# Altium PCB nRF52_UWB_MPU9255_Second.pcbdoc
Units mm, origin at the board's own origin, x right, y up, seen from the top; angles counter-clockwise.
Board outline 93.99 x 58.53 mm, 2 copper layers (Top Layer, Bottom Layer); 31 components, 47 nets, 182 pads, 50 vias.
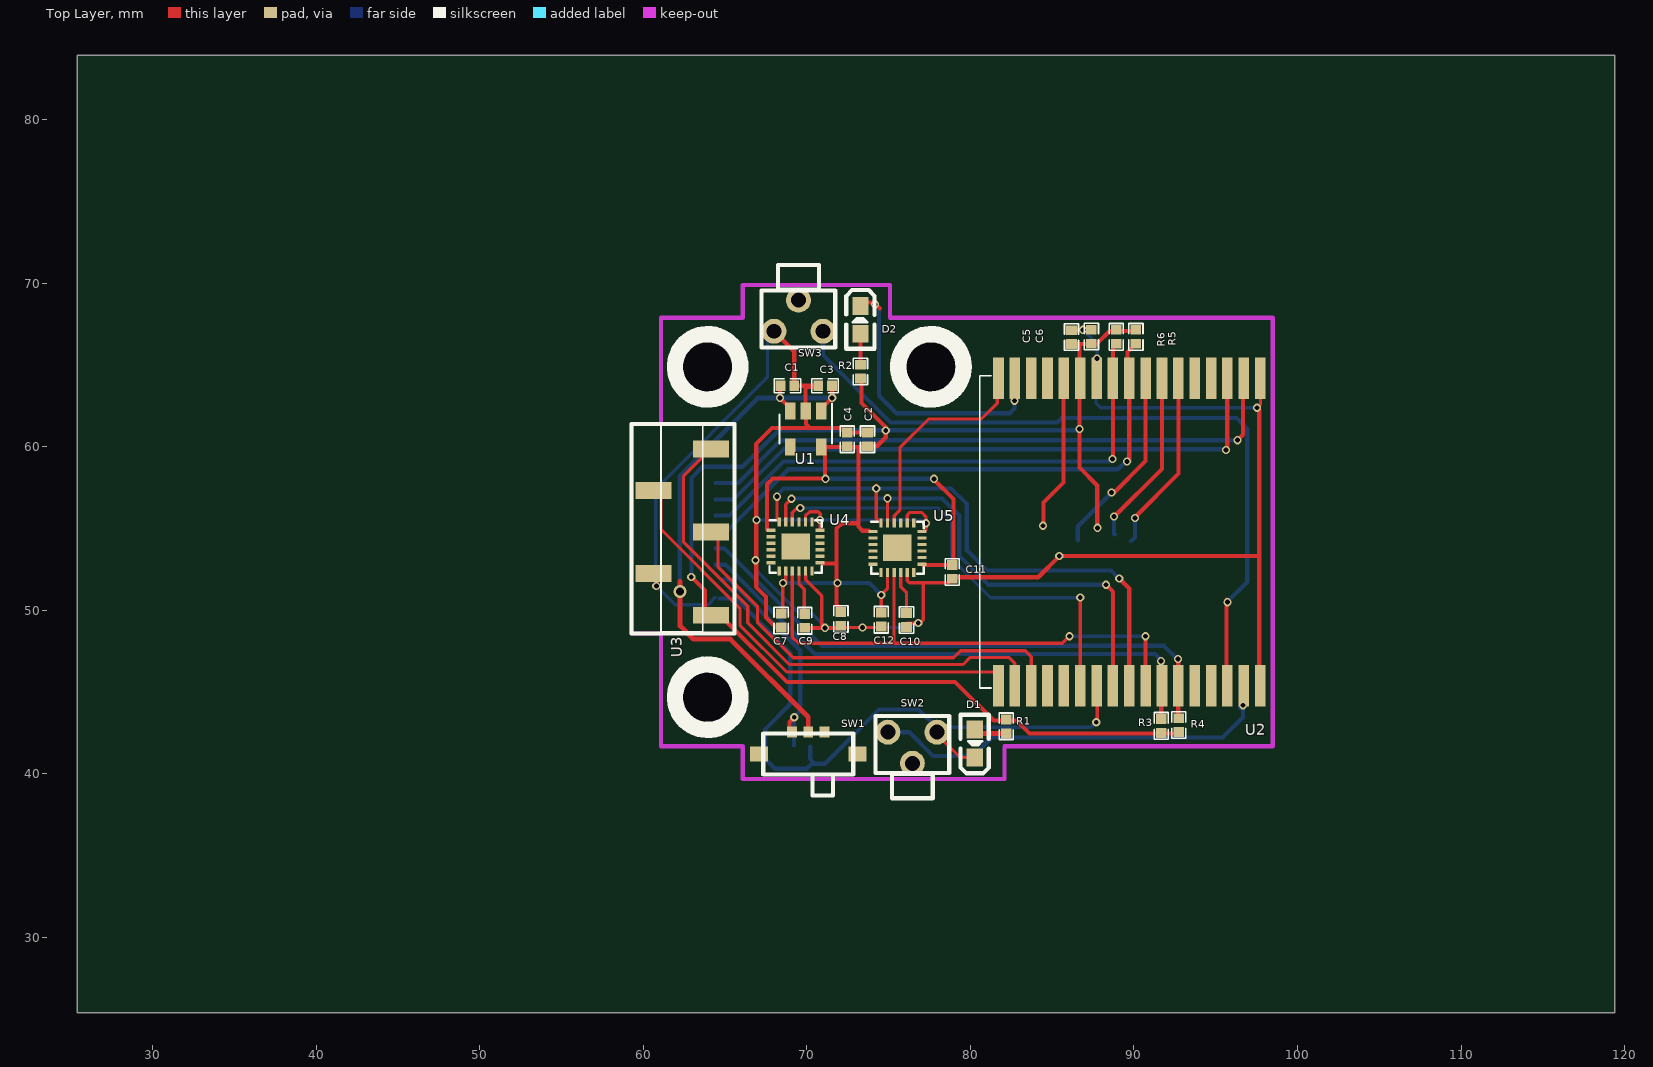
[diagram p0: Top Layer view]
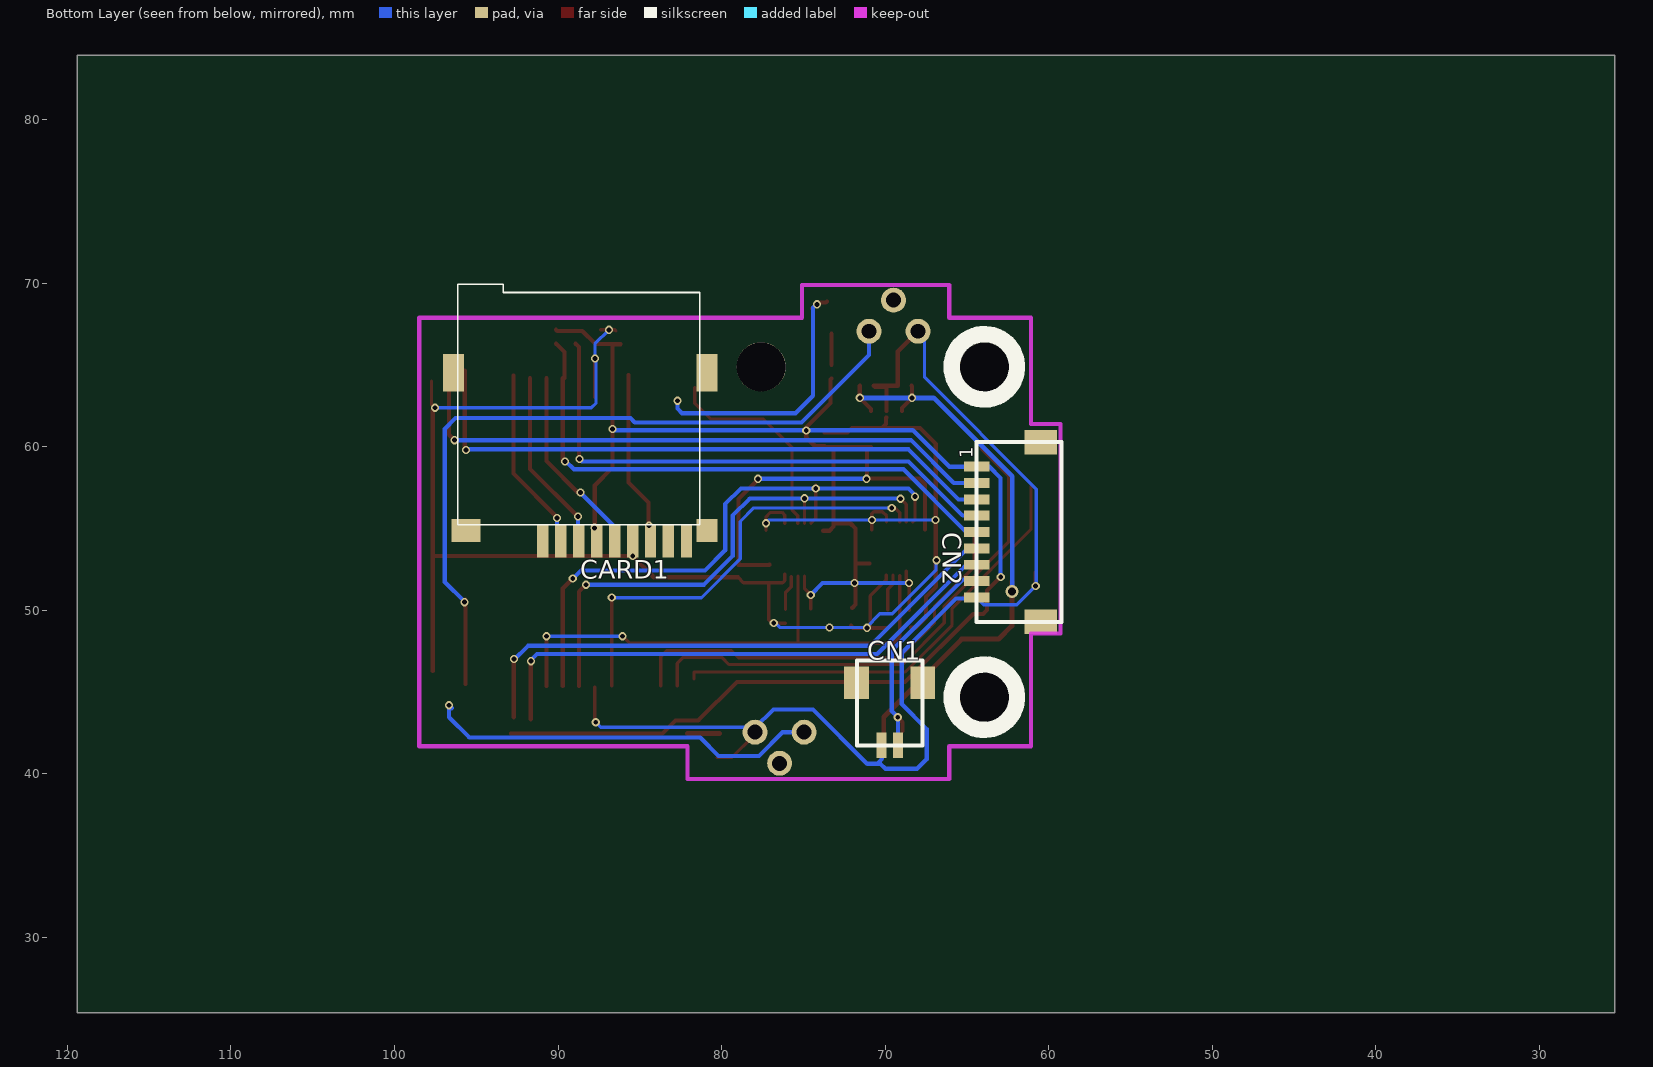
[diagram p1: Bottom Layer view, seen from below]

## Layer stack, top to bottom
Top Layer: signal copper 0.0356
Dielectric: dielectric 0.32, FR-4, Dk 4.8
Bottom Layer: signal copper 0.0356

## Board outline
119.391,25.4 25.4,25.4 25.4,83.929 119.391,83.929

## Design rules (kind name [scope] priority, off if disabled: settings)
Clearance [All] p1: gap=0.2
ComponentClearance [All] p1 off: gap=0.254 collisioncheckmode=3 verticalgap=0.254
PolygonConnect [All] p1: connectstyle=Relief reliefconductorwidth=0.254 reliefentries=4 polygonreliefangle="90 Angle"
RoutingVias [All] p1: holewidth=0.711 width=1.27 viastyle="Through Hole" minholewidth=0.3 minwidth=0.3 maxholewidth=0.711 maxwidth=1.27
SolderMaskExpansion [All] p1: expansion=0.102
TestPointUsage [All] p1: valid=0 allowmultiple=FALSE
Testpoint [All] p1: side=15 testpointundercomponent=TRUE minsize=1.016 maxsize=2.54 preferedsize=1.524 minholesize=0 maxholesize=1.016 preferedholesize=0.813 testpointgrid=0.025 style=1023 order=0123456789
Width [All] p1: maxlimit=1 minlimit=0.2 preferedwidth=0.254 minimp=50.000000 maximp=50.000000 favimp=50.000000
18 further rules are at their usual default settings.

## Components (designator, comment, footprint, x,y, rotation, side; value= is the part's Value field where it differs from the comment)
C1 "10uF" 0402 68.809,63.729 r180 top
C2 "10uF" 0402 73.711,60.452 r270 top
C3 "100nF" 0402 71.12,63.729 r0 top
C4 "100nF" 0402 72.466,60.452 r270 top
C5 "10uF" 0402 86.182,66.7 r270 top
C6 "100nF" 0402 87.401,66.726 r270 top
C7 "10nF" 0402 68.428,49.378 r90 top
C8 "100nF" 0402 72.085,49.479 r90 top
C9 "100nF" 0402 69.875,49.352 r270 top
C10 "100nF" 0402 76.098,49.403 r270 top
C11 "100nF" 0402 78.892,52.349 r90 top
C12 "10nF" 0402 74.549,49.428 r90 top
CARD1 "HYC77-TF09-200" TF-015 88.646,59.376 r180 bottom locked
CN1 "A1002WV-S-2P" A1002WR-S-2P_LEO 69.721,43.666 r180 bottom
CN2 "A1002WR-S-9P" A1002WR-S-9P_LEO 62.486,54.786 r270 bottom
D1 "YELLOW" LED-0603 80.264,41.85 r90 top
D2 "RED" LED-0603 73.279,67.758 r270 top
R1 "1K" 0402 82.194,42.901 r270 top
R2 "200" 0402 73.279,64.592 r270 top
R3 "10K" 0402 91.669,42.926 r270 top
R4 "10K" 0402 92.735,42.977 r270 top
R5 "10K" 0402 90.119,66.726 r90 top
R6 "10K" 0402 88.925,66.726 r90 top
SW1 "SSAJ120100" SW-SMD-5.5X2.5 70.087,41.885 r0 top
SW2 "KAN4562-0501C" KAN4562-0501C 76.454,41.596 r0 top
SW3 "KAN4562-0501C" KAN4562-0501C 69.487,68.012 r180 top
U1 "SPX3819M5-L-3-3/TR" SOT-23-5 69.926,61.087 r270 top
U2 "DWM1001" DWM1001 93.587,54.785 r270 top locked
U3 "GPS_Header" GPS_HEADER_SMT 61.087,41.685 r90 top locked
U4 "MPU-9250" QFN-24-1EP_3X3MM_PITCH0.4MM 69.317,53.899 r0 top
U5 "MPU-9250" QFN-24-1EP_3X3MM_PITCH0.4MM 75.54,53.823 r0 top

## Footprints (in the part's own frame and the unit in brackets; to place one, negate y for a bottom-side part, rotate by r counter-clockwise, add the part's x,y. Pads: shape width x height; smd on the part's side, far side on the other; paste and mask are expansions set on the pad)
0402 [mm]
  rect 0.6x0.65 smd: 1(-0.424,0) 2(0.424,0)
  silkscreen extent -0.82,-0.43 0.81,0.43
A1002WR-S-2P_LEO [mm]
  rect 0.6x1.55 smd: 1(-0.502,-1.925) 2(0.498,-1.925)
  rect 1.5x2 smd: 3(-2.033,1.904) 4(2.031,1.904)
  silkscreen extent -2,-1.92 2,3.27
A1002WR-S-9P_LEO [mm]
  rect 0.6x1.55 smd: 1(-4.001,-1.923) 2(-3,-1.923) 3(-1.997,-1.926) 4(-1.001,-1.923) 5(0,-1.923) 6(1,-1.923) 7(1.999,-1.923) 8(3.001,-1.923) 9(4,-1.923)
  rect 1.5x2 smd: 10(-5.499,2) 11(5.5,2)
  silkscreen extent -5.5,-1.92 5.5,3.28
DWM1001 [mm]
  rect 2.54x0.65 smd: 1(-9.404,4.129) 2(-9.404,3.129) 3(-9.404,2.128) 4(-9.404,1.13) 5(-9.404,0.129) 6(-9.404,-0.872) 7(-9.404,-1.87) 8(-9.404,-2.871) 9(-9.404,-3.872) 10(-9.404,-4.871) 11(-9.404,-5.871) 12(-9.404,-6.871) 13(-9.404,-7.872) 14(-9.404,-8.87) 15(-9.404,-9.871) 16(-9.404,-10.872) 17(-9.404,-11.87) 18(9.404,-11.87) 19(9.404,-10.872) 20(9.404,-9.871) 21(9.404,-8.87) 22(9.404,-7.872) 23(9.404,-6.871) 24(9.404,-5.871) 25(9.404,-4.871) 26(9.404,-3.872) 27(9.404,-2.871) 28(9.404,-1.87) 29(9.404,-0.872) 30(9.404,0.129) 31(9.404,1.13) 32(9.404,2.128) 33(9.404,3.129) 34(9.404,4.129)
  silkscreen extent -9.56,-13.02 9.54,-12.32
GPS_HEADER_SMT [mm]
  rect 1.02x2.2 smd: 1(8.02,-3.051) 2(10.56,0.45) 3(13.1,-3.051) 4(15.64,0.45) 5(18.18,-3.051)
  round 3 hole 3 unplated: ""(3,-2.85) ""(23.2,-2.85)
  silkscreen extent 1,-4.85 25.2,1.8
KAN4562-0501C [mil]
  round 60 hole 36: 0(0,-37.4) 1(-59.05,37.4) 2(59.06,37.4)
  silkscreen extent -89,-122 89,77
LED-0603 [mil]
  rect 43x39 smd: 1(33.5,0) 2(-33.5,0)
  silkscreen extent -72,-34 70,34
QFN-24-1EP_3X3MM_PITCH0.4MM [mm]
  rect 0.55x0.2 smd: 1(-1.5,0.999) 2(-1.5,0.601) 3(-1.5,0.199) 4(-1.5,-0.199) 5(-1.5,-0.601) 6(-1.5,-0.999) 13(1.5,-0.999) 14(1.5,-0.601) 15(1.5,-0.199) 16(1.5,0.199) 17(1.5,0.601) 18(1.5,0.999)
  rect 0.2x0.55 smd: 7(-0.999,-1.5) 8(-0.601,-1.5) 9(-0.199,-1.5) 10(0.199,-1.5) 11(0.601,-1.5) 12(0.999,-1.5) 19(0.999,1.5) 20(0.601,1.5) 21(0.199,1.5) 22(-0.199,1.5) 23(-0.601,1.5) 24(-0.999,1.5)
  rect 0.875x0.8 smd: 25(-0.434,-0.4) 25(-0.434,0.4) 25(0.436,-0.4) 25(0.436,0.4)
  silkscreen extent -1.6,-1.6 1.6,1.6
SOT-23-5 [mm]
  rect 1.06x0.65 smd: 1(-1.1,0.95) 2(-1.1,0) 3(-1.1,-0.95) 4(1.1,-0.95) 5(1.1,0.95)
  silkscreen extent -1.55,-1.61 0.9,1.61
SW-SMD-5.5X2.5 [mm]
  rect 0.6x0.7 smd: 1(-0.999,0.675) 2(1,0.675) C(-0.001,0.675)
  rect 1.1x0.9 smd: 4(-2.999,-0.675) 5(3,-0.675)
  silkscreen extent -2.75,-3.22 2.75,0.57
TF-015 [mil]
  rect 27.56x78.74 smd: 1(-90.2,-202.55) 2(-46.95,-202.5) 3(-3.75,-202.55) 4(39.5,-202.55) 5(82.8,-202.55) 6(126,-202.55) 7(169.2,-202.55) 8(212.4,-202.55) 9(255.9,-202.55)
  rect 50x55 smd: 10(305,-177.4)
  rect 50x90 smd: 11(305,202.6) 12(-305,202.6)
  rect 70x55 smd: 13(-275,-177.4)
  silkscreen extent -295,-163 288,416

## Free pads (board coordinates)
  round 3 hole 3 unplated: ""(77.587,64.885)

## Via types
v1: diameter 0.5, hole 0.3, Top Layer to Bottom Layer, tented both sides, 49 vias
v2: diameter 0.8, hole 0.5, Top Layer to Bottom Layer, tented both sides, 1 vias

## Nets (pads, with @x,y where several pads share a name; then routed paths per layer and width w, separated by ;. In a path a pad name is that pad's centre, name@x,y a point inside that pad or via, vN(x,y) a via of type N, cw(c..) or ccw(c..) an arc to the next point about the centre after c; other vN are vias at no path point)
BUTTON_RST: SW2.1 U2.33 | length 24.2
  Bottom Layer w0.254: SW2.1 76.275,42.546 77.724,41.097 80.188,41.097 81.305,42.215 95.428,42.215 96.672,43.459 v1@96.672,44.171
  Bottom Layer w0.3: v1@96.52,44.018 v1@96.672,44.171
  other v1: 96.664,44.196
BUTTON_SDCARD: SW3.1 U2.32 | length 45.7
  Top Layer w0.254: U2.32@95.656,45.491 v1@95.656,50.648
  Bottom Layer w0.254: SW3.1 70.987,65.614 75.115,61.486 85.311,61.486 85.573,61.747 96.266,61.747 96.926,61.087 96.926,51.74 v1@95.733,50.546
  other v1: 95.724,50.495
CHARGE_VC: CN1.2 CN2.8 SW1.1 | length 13.5
  Top Layer w0.254: SW1.1@68.936,42.621 68.936,43.155 v1@69.24,43.459
  Bottom Layer w0.254: CN2.8@64.846,51.892 65.253,51.892 69.596,47.549 69.596,43.833 69.223,43.459 CN1.2
  other v1: 69.232,43.459
D2_1: D2.1 R2.1 | length 1.9
  Top Layer w0.254: R2.1 D2.1
FOOT_2: CN2.4 R6.1 U2.10 | length 32.9
  Top Layer w0.254: v1@88.716,59.258 88.716,66.092 R6.1
  Bottom Layer w0.254: CN2.4 65.261,55.787 68.58,59.106 88.544,59.106 v1(88.697,59.258)
FOOT_5: CN2.5 R5.1 U2.9 | length 34.3
  Top Layer w0.254: U2.9@89.611,64.211 89.611,65.794 R5.1 ; v1@89.715,59.106 U2.9
  Bottom Layer w0.254: CN2.5 65.048,54.786 68.885,58.623 89.027,58.623 v1@89.51,59.106
  other v1: 89.586,59.106
FOOT_6: CN2.6 R4.1 U2.29 | length 34.7
  Top Layer w0.3: v1@92.685,47.041 92.71,47.015 R4.1@92.71,43.485
  Bottom Layer w0.254: CN2.6 64.959,53.786 70.917,47.828 91.846,47.828 v1@92.71,46.965
  other v1: 92.701,47.015
FOOT_7: CN2.7 R3.1 U2.28 | length 33.3
  Top Layer w0.3: R3.1 v1@91.669,46.888
  Bottom Layer w0.254: CN2.7 65.018,52.787 70.485,47.32 91.288,47.32 v1@91.719,46.888
  other v1: 91.66,46.888
GND: C1.1 C2.1 C3.1 C4.1 C5.1 C6.1 C7.1 C8.1 C9.2 C10.2 C11.1 C12.1 CARD1.6 CN1.1 CN2.9 D1.2 SW2.2 SW3.2 U1.2 U2.1 U2.11 U2.24 U2.34 U3.2 U4.11 U4.18 U4.20 U5.11 U5.18 U5.20 | length 191.6
  Top Layer w0.2: v1@60.808,51.486 60.833,51.511 U3.2@60.833,52.324 ; U4.20 69.917,55.77 70.18,56.032 70.688,56.032 70.815,55.905 U4.18@70.815,54.915 ; U4.11@69.926,52.146 69.926,51.867 70.917,50.876 v1@70.917,48.928 ; C8.1@72.187,48.946 C12.1@74.803,48.946 ; C10.2@76.098,49.207 76.893,49.207 77.114,49.428 77.114,51.689 ; U5.20 76.14,55.82 76.302,55.982 77.013,55.982 77.292,55.702 U5.18@77.292,54.889 ; U5.11@76.147,52.204 76.147,51.819 76.276,51.689 78.664,51.689 C11.1@78.994,52.019 ; SW2.2@78.08,42.291 79.371,40.999 D1.2 ; C5.1@86.462,67.081 86.53,67.15 C6.1 ; v1@87.681,43.104 87.757,43.18 U2.24@87.757,45.288 ; U2.11@87.706,65.456 87.757,65.405 U2.11@87.757,63.017 ; v1@97.536,62.357 97.739,62.56 U2.1@97.739,64.008
  Top Layer w0.254: SW3.2 69.233,65.816 C1.1 C3.1 70.62,63.652 69.901,63.652 69.926,63.627 U1.2 ; C7.1 68.115,48.953 67.513,49.555 67.513,50.825 66.904,51.435 66.904,60.173 67.869,61.138 72.034,61.138 72.296,60.876 C2.1 ; C9.2 71.958,48.928 C8.1 ; U1.2@69.926,61.798 69.952,61.773 69.952,61.392 70.206,61.138 ; C11.1@78.994,52.019 84.15,52.019 85.446,53.315 97.663,53.315 ; v1(97.527,62.382) 97.663,62.247 U2.34@97.663,46.279
  Bottom Layer w0.2: CN2.9 63.966,50.343 61.951,50.343 60.757,51.537 60.757,57.404 67.589,64.237 67.589,66.665 SW3.2 ; v1@66.878,53.061 66.898,53.041 66.898,52.451 69.565,49.784 70.333,49.784 71.171,48.946 76.429,48.946 v1@76.733,49.251 ; v1@66.929,55.524 77.08,55.524 v1(77.283,55.321) ; SW2.2 78.258,42.85 87.401,42.85 v1@87.706,43.155 ; v1(86.885,67.15) 87.748,66.286 v1(87.748,65.405) 87.681,65.338 87.681,62.662 87.96,62.382 v1(97.527,62.382)
  Bottom Layer w0.254: CN2.9@64.668,50.724 65.659,50.724 68.986,47.396 68.986,44.272 67.462,42.748 67.462,40.894 68.047,40.31 69.977,40.31 70.282,40.615 71.095,40.615 74.422,43.942 76.835,43.942 SW2.2@77.978,42.799 ; CN1.1@70.206,41.656 70.206,40.919 70.51,40.615 ; SW2.2@77.749,42.062 SW2.2@77.927,42.24
  other v1: 87.697,43.155 71.12,48.928 73.406,48.946 76.812,49.228 60.799,51.486 66.869,53.061 85.437,53.315 66.92,55.524 70.806,55.524
GPS_1PPS: U2.19 U3.5 | length 32
  Top Layer w0.2: U3.5 62.459,58.186 62.459,54.178 66.396,50.241 66.396,49.225 68.936,46.685 79.553,46.685 79.985,47.117 82.347,47.117 82.715,46.749 U2.19
GPS_UART_RX: U2.18 U3.4 | length 27.9
  Top Layer w0.2: U3.4@61.087,57.582 61.087,54.94 65.913,50.114 65.913,49.098 68.783,46.228 81.686,46.228 U2.18@81.686,45.796
GPS_UART_TX: U2.20 U3.3 | length 26.5
  Top Layer w0.2: U3.3@64.567,54.991 64.567,52.654 66.98,50.241 66.98,49.276 69.164,47.092 78.969,47.092 79.4,47.523 83.363,47.523 83.716,47.17 U2.20
LED_R: D2.2 U2.16 | length 16.2
  Top Layer w0.254: D2.2@73.558,68.885 73.635,68.809 74.117,68.809 74.473,68.453
  Bottom Layer w0.254: v1@74.168,68.758 74.422,68.504 74.422,63.119 75.492,62.049 82.42,62.049 82.702,62.332 v1(82.702,62.814)
  other v1: 74.168,68.707
MPU92_CLK: U2.25 U4.23 U5.23 | length 32.2
  Top Layer w0.2: U4.23 68.716,56.473 v1(69.063,56.82) ; U5.23 v1@74.939,56.845
  Top Layer w0.254: v1(88.29,51.562) 88.716,51.137 U2.25
  Bottom Layer w0.254: v1@69.113,56.845 78.276,56.845 79.324,55.797 79.324,53.328 81.071,51.582 ; 81.071,51.562 v1(88.29,51.562)
  other v1: 74.93,56.845
MPU92_MISO: U2.27 U4.9 U5.9 | length 32.8
  Top Layer w0.2: 69.113,52.121 69.113,48.362 69.494,47.981 85.623,47.981 v1(86.055,48.412) ; 75.336,47.981 U5.9@75.336,52.095
  Top Layer w0.254: U2.27 v1(90.716,48.412)
  Bottom Layer w0.2: v1(86.055,48.412) v1(90.716,48.412)
MPU92_MOSI: U2.26 U4.24 U5.24 | length 36
  Top Layer w0.2: v1(68.174,56.947) 68.174,55.542 U4.24 ; v1@74.244,57.658 74.244,55.617 U5.24
  Top Layer w0.254: v1(89.103,51.943) 89.715,51.331 U2.26
  Bottom Layer w0.254: v1@68.123,56.998 68.58,57.455 78.816,57.455 79.781,56.49 79.781,53.67 81.026,52.426 88.595,52.426 89.078,51.943 v1(89.103,51.943)
  other v1: 74.244,57.455
MPU92_NCS: U2.23 U4.22 | length 27.4
  Top Layer w0.2: U4.22 69.117,55.974 69.405,56.261 v1(69.596,56.261) ; U2.23 v1(86.716,50.775)
  Bottom Layer w0.2: v1@69.545,56.261 78.034,56.261 78.867,55.428 78.867,53.139 81.231,50.775 v1(86.716,50.775)
MPU92B_NCS: U2.17 U5.22 | length 12.8
  Top Layer w0.2: U5.22 75.34,55.777 75.692,56.128 75.692,59.944 77.445,61.697 80.67,61.697 81.636,62.662 U2.17@81.636,63.602
R1_2: D1.1 R1.2 | length 2
  Top Layer w0.3: D1.1@80.137,42.469 R1.2@82.093,42.469
S$33: 
S$35: 
S$39: 
S$41: 
S$52: 
S$54: 
S$1130: 
S$1132: 
S$1135: 
S$1137: 
S$1140: 
S$1142: 
S$1144: 
S$1146: 
S$1148: 
S$1150: 
S$1152: 
S$1154: 
SDCARD_CLK: CARD1.5 U2.8 | length 11.7
  Top Layer w0.254: v1@88.722,57.125 90.716,59.118 U2.8
  Bottom Layer w0.254: CARD1.5@86.563,54.28 86.563,55.118 v1@88.646,57.201
  other v1: 88.637,57.201
SDCARD_MISO: CARD1.7 U2.13 | length 9.7
  Top Layer w0.254: v1@84.404,55.194 84.48,55.27 84.48,56.591 85.7,57.81 U2.13@85.7,64.389
  other v1: 84.446,55.169
SDCARD_MOSI: CARD1.3 U2.7 | length 10.8
  Top Layer w0.254: v1@88.798,55.728 91.717,58.646 U2.7
  Bottom Layer w0.254: v1(88.79,55.728) 88.79,54.67 CARD1.3@88.824,54.635
SDCARD_NCS: CARD1.2 U2.6 | length 11.3
  Top Layer w0.254: v1@90.018,55.651 92.735,58.369 U2.6@92.735,64.364
  Bottom Layer w0.254: CARD1.2 90.06,54.454 v1(90.06,55.651)
SWD_CLK: CN2.2 U2.2 | length 37.3
  Top Layer w0.254: v1(96.342,60.401) 96.672,60.731 U2.2@96.672,64.567
  Bottom Layer w0.254: CN2.2 65.805,57.786 68.42,60.401 v1(96.342,60.401)
SWD_DIO: CN2.3 U2.3 | length 37.3
  Top Layer w0.254: v1@95.707,59.792 U2.3@95.707,64.643
  Bottom Layer w0.254: CN2.3 65.52,56.783 68.58,59.842 v1@95.631,59.842
  other v1: 95.631,59.792
U4_10: C9.1 U4.10 | length 2.3
  Top Layer w0.2: U4.10@69.517,52.153 69.517,51.615 69.85,51.283 C9.1@69.85,50.038
U5_10: C10.1 U5.10 | length 2.1
  Top Layer w0.2: U5.10@75.74,52.052 75.74,51.43 76.098,51.072 C10.1@76.098,50.056
VCC3.3: C2.2 C4.2 C5.2 C6.2 C7.2 C8.2 C11.2 C12.2 CARD1.4 CN2.1 R1.1 R2.2 R3.2 R4.2 R5.2 R6.2 U1.5 U2.12 U3.1 U4.1 U4.8 U4.13 U5.1 U5.8 U5.13 | length 137
  Top Layer w0.2: C7.2@68.529,49.987 68.529,51.46 68.707,51.638 U4.8@68.707,52.399 ; C12.2@74.549,50.081 v1(74.549,50.945) 74.927,51.323 U5.8@74.927,52.077
  Top Layer w0.254: v1@62.941,52.045 63.779,51.206 63.779,50.013 64.008,49.784 64.618,49.784 68.783,45.618 79.07,45.618 81.432,43.256 82.829,43.256 83.617,42.469 R4.2@92.888,42.469 ; U4.1@67.564,54.94 67.564,57.709 67.92,58.064 71.12,58.064 U1.5@71.12,59.987 ; U1.5 73.67,59.987 C2.2 74.277,60.028 74.828,60.579 74.828,61.189 73.337,62.68 73.337,64.11 R2.2 ; U4.13@70.968,52.857 71.763,52.857 71.806,52.901 ; C8.2@72.009,50.157 71.806,50.361 71.806,54.991 72.136,55.321 73.152,55.321 ; 73.152,59.962 73.152,55.118 73.406,54.864 U5.1@73.787,54.864 ; U5.13@77.068,52.795 77.089,52.774 78.969,52.774 78.969,56.794 v1@77.749,58.014 ; v1@87.782,55.042 87.757,55.067 87.757,57.633 86.665,58.725 86.665,66.218 86.716,66.269 86.19,66.269 C5.2 87.714,66.276 88.519,67.081 90.051,67.081 R5.2
  Bottom Layer w0.254: v1@62.941,52.045 62.941,58.09 63.627,58.776 66.076,58.776 68.312,61.011 v1@86.69,61.011 ; v1(68.546,51.664) 73.83,51.664 v1(74.549,50.945) ; v1(71.145,58.039) v1@77.71,58.039
  other v1: 71.882,51.664 62.932,52.045 87.774,55.042 77.775,58.039 74.828,60.985 86.665,61.087
VCC3.7: C1.2 C3.2 SW1.C U1.1 U1.3 | length 38.9
  Top Layer w0.254: C1.2 68.351,63.696 v1(68.351,62.992) 68.976,62.367 U1.3 ; U1.1 70.876,62.316 v1(71.552,62.992) 71.552,63.721 C3.2
  Top Layer w0.3: 62.255,51.748 62.255,49.047 63.068,48.235 65.329,48.235 70.086,43.477 SW1.C
  Bottom Layer w0.254: v1(68.351,62.992) v1(71.552,62.992)
  Bottom Layer w0.3: v2@62.23,51.156 62.23,58.191 67.031,62.992 v1(71.552,62.992)
  other v2: 62.255,51.156
pads on no net: CARD1.1 CARD1.8 CARD1.9 CARD1.10 CARD1.11 CARD1.12 CARD1.13 CN1.3 CN1.4 CN2.10 CN2.11 SW1.2 SW1.4 SW1.5 SW2.0 SW3.0 U1.4 U2.4 U2.5 U2.14 U2.15 U2.21 U2.22 U2.30 U2.31 U3. U4.2 U4.3 U4.4 U4.5 U4.6 U4.7 U4.12 U4.14 U4.15 U4.16 U4.17 U4.19 U4.21 U4.25 U5.2 U5.3 U5.4 U5.5 U5.6 U5.7 U5.12 U5.14 U5.15 U5.16 U5.17 U5.19 U5.21 U5.25

## Keep-outs
Keep-Out Layer:
  lines w0.254: 59.287,48.585 61.087,48.585 61.087,41.685 66.087,41.685 66.087,39.685 82.087,39.685 82.087,41.685 98.487,41.685 98.487,67.885 75.087,67.885 75.087,69.885 66.087,69.885 66.087,67.885 61.087,67.885 61.087,61.385 59.287,61.385 59.287,48.585

## Silkscreen, mask and mechanical layers (free items; w line width, h text height)
Top Overlay:
  circle w1: c77.587,64.885 r2
Document:
  text "SDCard(27.5 8.5)" at 38.481,66.869 h2.03
  text "GPS(0 26.2)" at 38.354,63.821 h2.03
  text "9P(1.4 13.1)" at 38.354,60.773 h2.03
  text "UWB(32.5 13.1)" at 38.1,57.979 h2.03

## Text inside footprints (layer, text, board x,y; h text height)
CN2: Bottom Overlay "1" at 64.65,59.286 h0.8 r270
U3: Document "26.2" at 59.91,61.785 h2.03 r90; Document "37.4" at 80.172,40.132 h2.03 r180